# Altium PCB stepper.PcbDoc
Units mil, origin at the board's own origin, x right, y up, seen from the top; angles counter-clockwise.
Board outline 1150 x 1150 mil, 2 copper layers (Top Layer, Bottom Layer); 2 components, 2 nets, 15 pads, 0 vias.
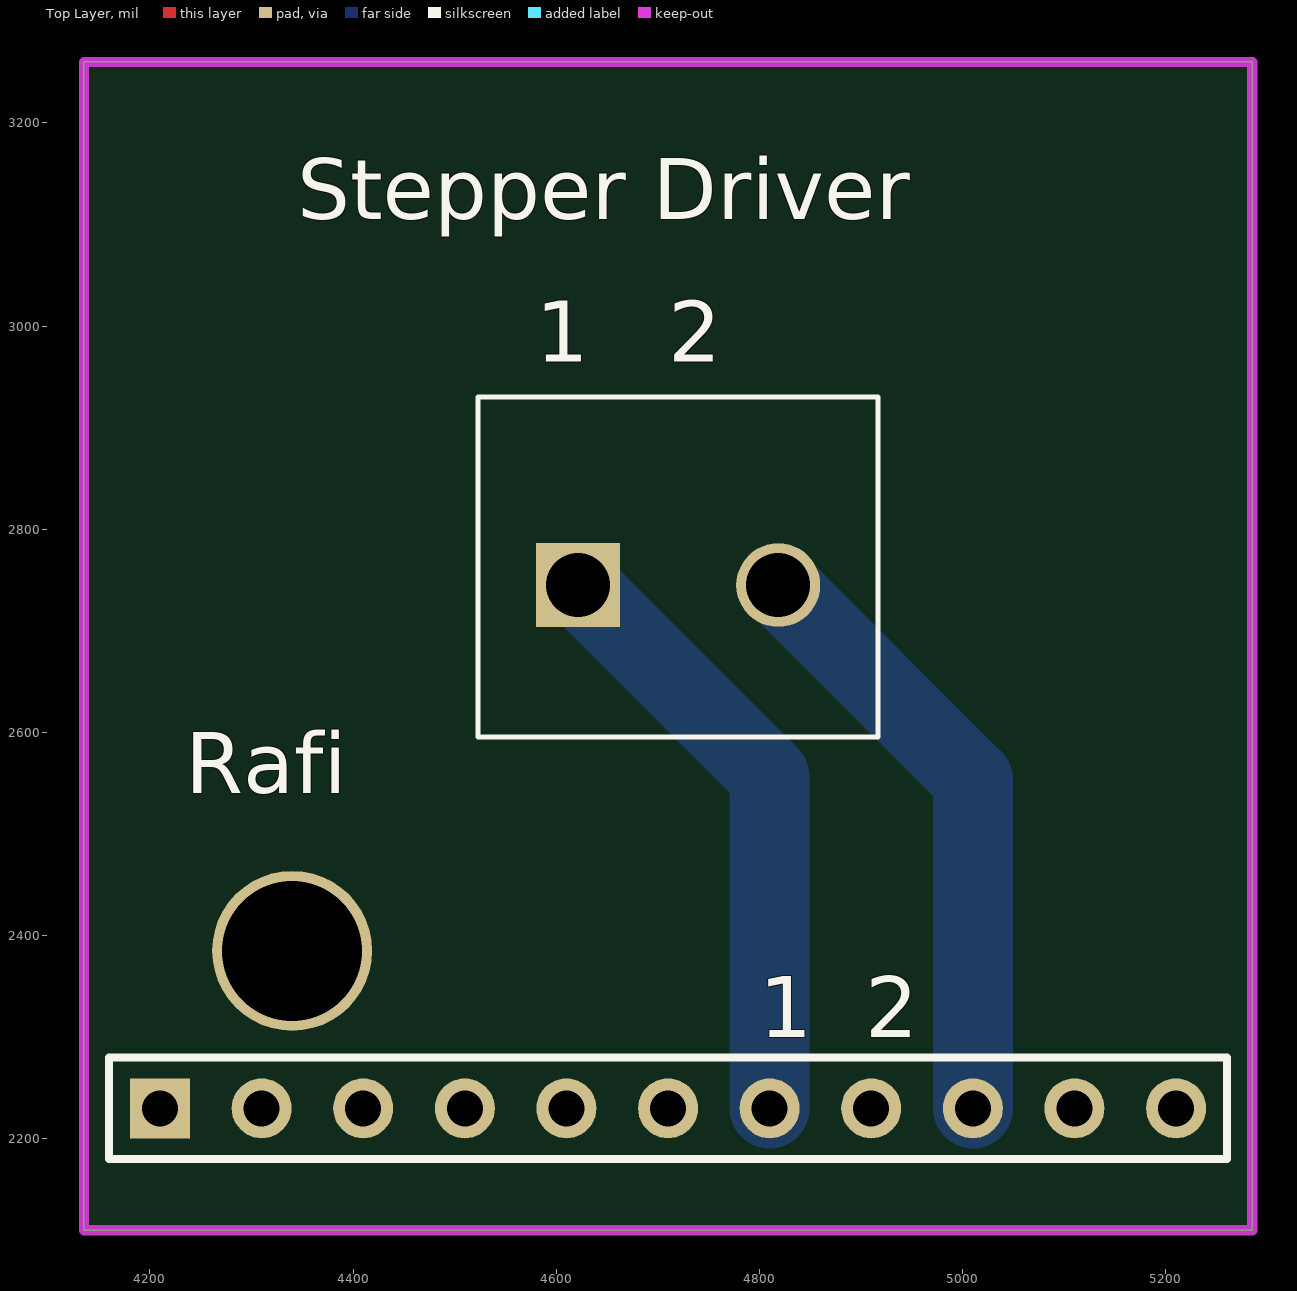
[diagram p0: Top Layer view]
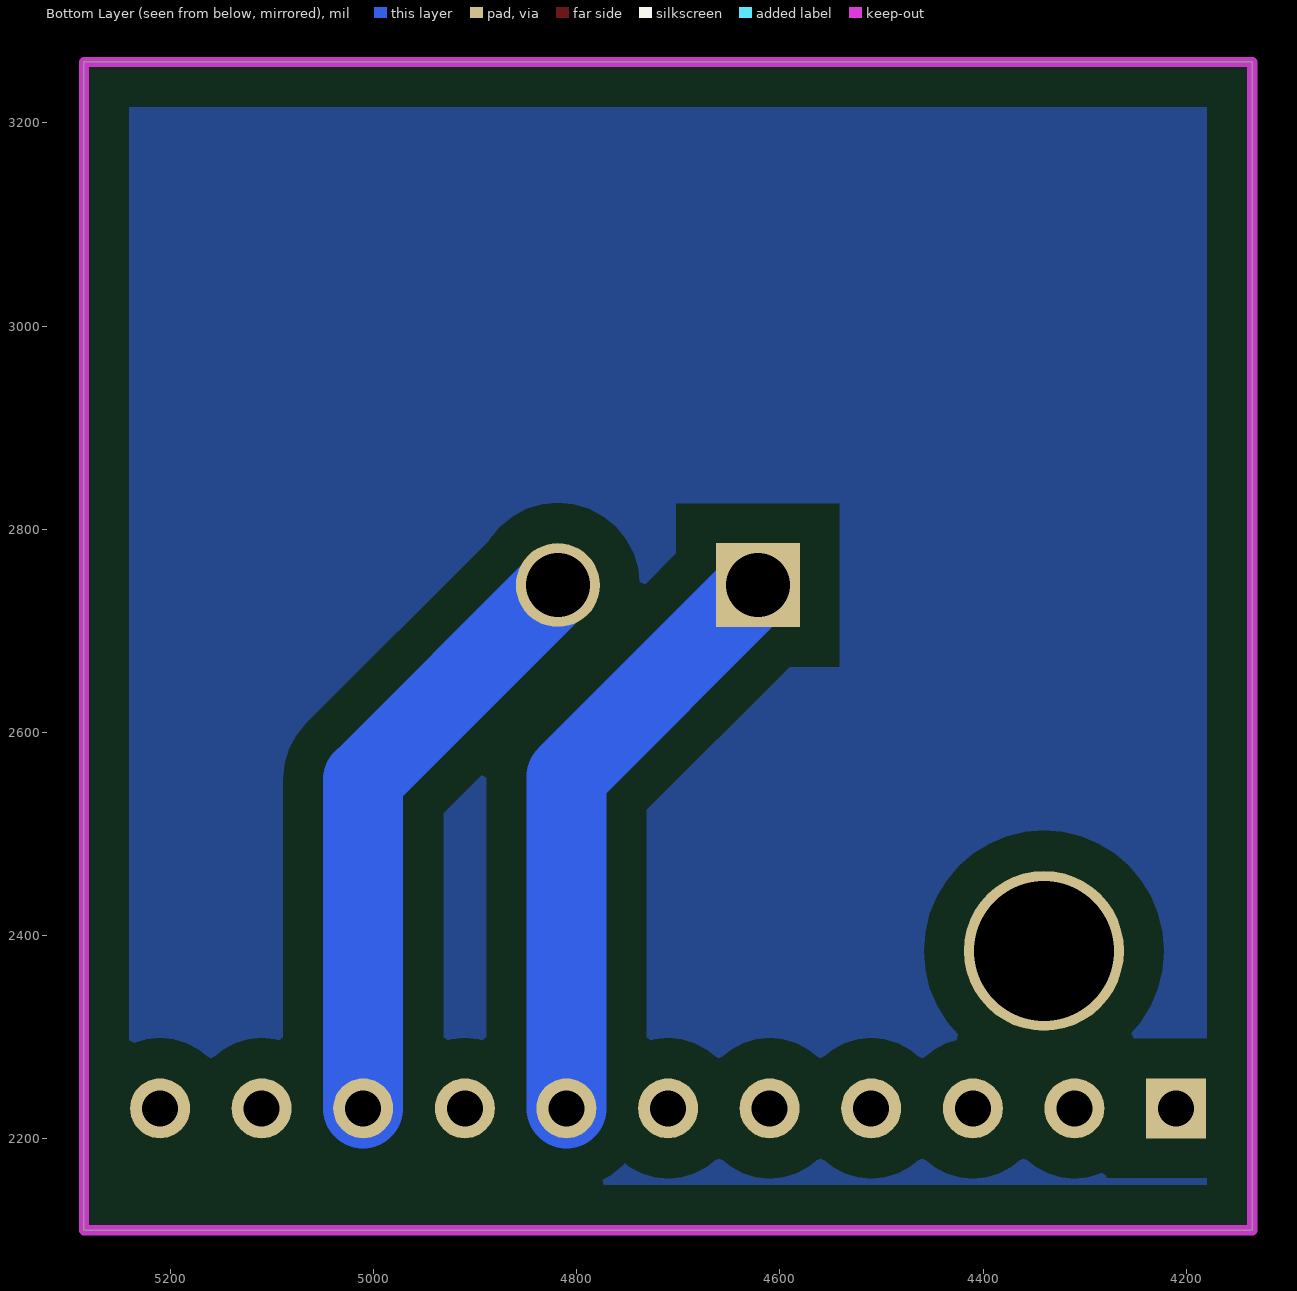
[diagram p1: Bottom Layer view, seen from below]

## Layer stack, top to bottom
Top Solder: solder mask 0.4, Solder Resist, Dk 3.5
Top Layer: signal copper 1.4
Dielectric 1: dielectric 12.6, FR-4, Dk 4.8
Bottom Layer: signal copper 1.4
Bottom Solder: solder mask 0.4, Solder Resist, Dk 3.5

## Board outline
4135,2110 5285,2110 5285,3260 4135,3260

## Design rules (kind name [scope] priority, off if disabled: settings)
Clearance [All] p1: gap=39.37
PolygonConnect [All] p1: connectstyle=Relief reliefconductorwidth=10 reliefentries=4 polygonreliefangle="90 Angle" airgapwidth=10
RoomDefinition stepper [InComponentClass('stepper')] p1: confinementstyle=ConfineIn formatcopy=TRUE lockcomponents=FALSE outline 0,0 2000,0 2000,1000 0,1000
RoutingVias [All] p1: holewidth=28 width=50 viastyle="Through Hole" minholewidth=28 minwidth=50 maxholewidth=28 maxwidth=50
SolderMaskExpansion [All] p1: expansion=4
Width [All] p1: maxlimit=78.74 minlimit=78.74 preferedwidth=78.74
30 further rules are at their usual default settings.

## Components (designator, comment, footprint, x,y, rotation, side; value= is the part's Value field where it differs from the comment)
"1  2" "Header 11" HDR1X11 4210,2230 r0 top (schematic designator P?)
"1   2" "WE-Terminal Blocks Plugable Type 691311700002" 691311700002 4720,2745 r0 top (schematic designator C?)

## Footprints (in the part's own frame and the unit in brackets; to place one, negate y for a bottom-side part, rotate by r counter-clockwise, add the part's x,y. Pads: shape width x height; smd on the part's side, far side on the other; paste and mask are expansions set on the pad)
691311700002 [mm] "5.00mm - Open Vertical PCB Header - 02p"
  rect 2.1x2.1 hole 1.6: 1(-2.5,0)
  round 2.1 hole 1.6: 2(2.5,0)
  silkscreen extent -5,-3.8 5,4.7, body extent -5,-3.8 5,4.7, height 12.01
HDR1X11 [mm] "Connector; Header; 11 Position"
  rect 1.5x1.5 hole 0.9: 1(0,0)
  round 1.5 hole 0.9: 2(2.54,0) 3(5.08,0) 4(7.62,0) 5(10.16,0) 6(12.7,0) 7(15.24,0) 8(17.78,0) 9(20.32,0) 10(22.86,0) 11(25.4,0)
  silkscreen extent -1.27,-1.27 26.67,1.27

## Part data
"1  2": "Header, 11-Pin"
"1   2": "WR-TBL Terminal block - serie 3117 - 5.00mm"

## Free pads (board coordinates)
  round 157.48 hole 137.8: 10(4340,2385) 10(4340,2385)

## Nets (pads, with @x,y where several pads share a name; then routed paths per layer and width w, separated by ;. In a path a pad name is that pad's centre, name@x,y a point inside that pad or via, vN(x,y) a via of type N, cw(c..) or ccw(c..) an arc to the next point about the centre after c; other vN are vias at no path point)
NetC?_1: "1  2.7" "1   2.1" | length 593
  Bottom Layer w78.74: 4621.58,2745 4810,2556.58 4810,2230
NetC?_2: "1  2.9" "1   2.2" | length 594.4
  Bottom Layer w78.74: 4818.43,2745 5010,2553.43 5010,2230
pads on no net: "1  2.1" "1  2.2" "1  2.3" "1  2.4" "1  2.5" "1  2.6" "1  2.8" "1  2.10" "1  2.11"

## Polygon pours and split planes (outlines as drawn)
no net on Bottom Layer "Bottom Layer-GND" (solid, pour order 2): 4135,3260 4135,2110 5285,2110 5285,3260 4135,3260

## Keep-outs
Keep-Out Layer:
  the board outline again, w10

## Silkscreen, mask and mechanical layers (free items; w line width, h text height)
Top Overlay:
  text "Stepper Driver" at 4345,3105 h60
  text "Rafi" at 4235,2540 h60